# Altium PCB mcu.PcbDoc (part 3 of 3)
Units mil, origin at the board's own origin, x right, y up, seen from the top; angles counter-clockwise.
Board outline 2000 x 2000 mil, 2 copper layers (Top Layer, Bottom Layer); 145 components, 109 nets, 608 pads, 708 vias.
Unrouted connection lines stored in the file: 2.
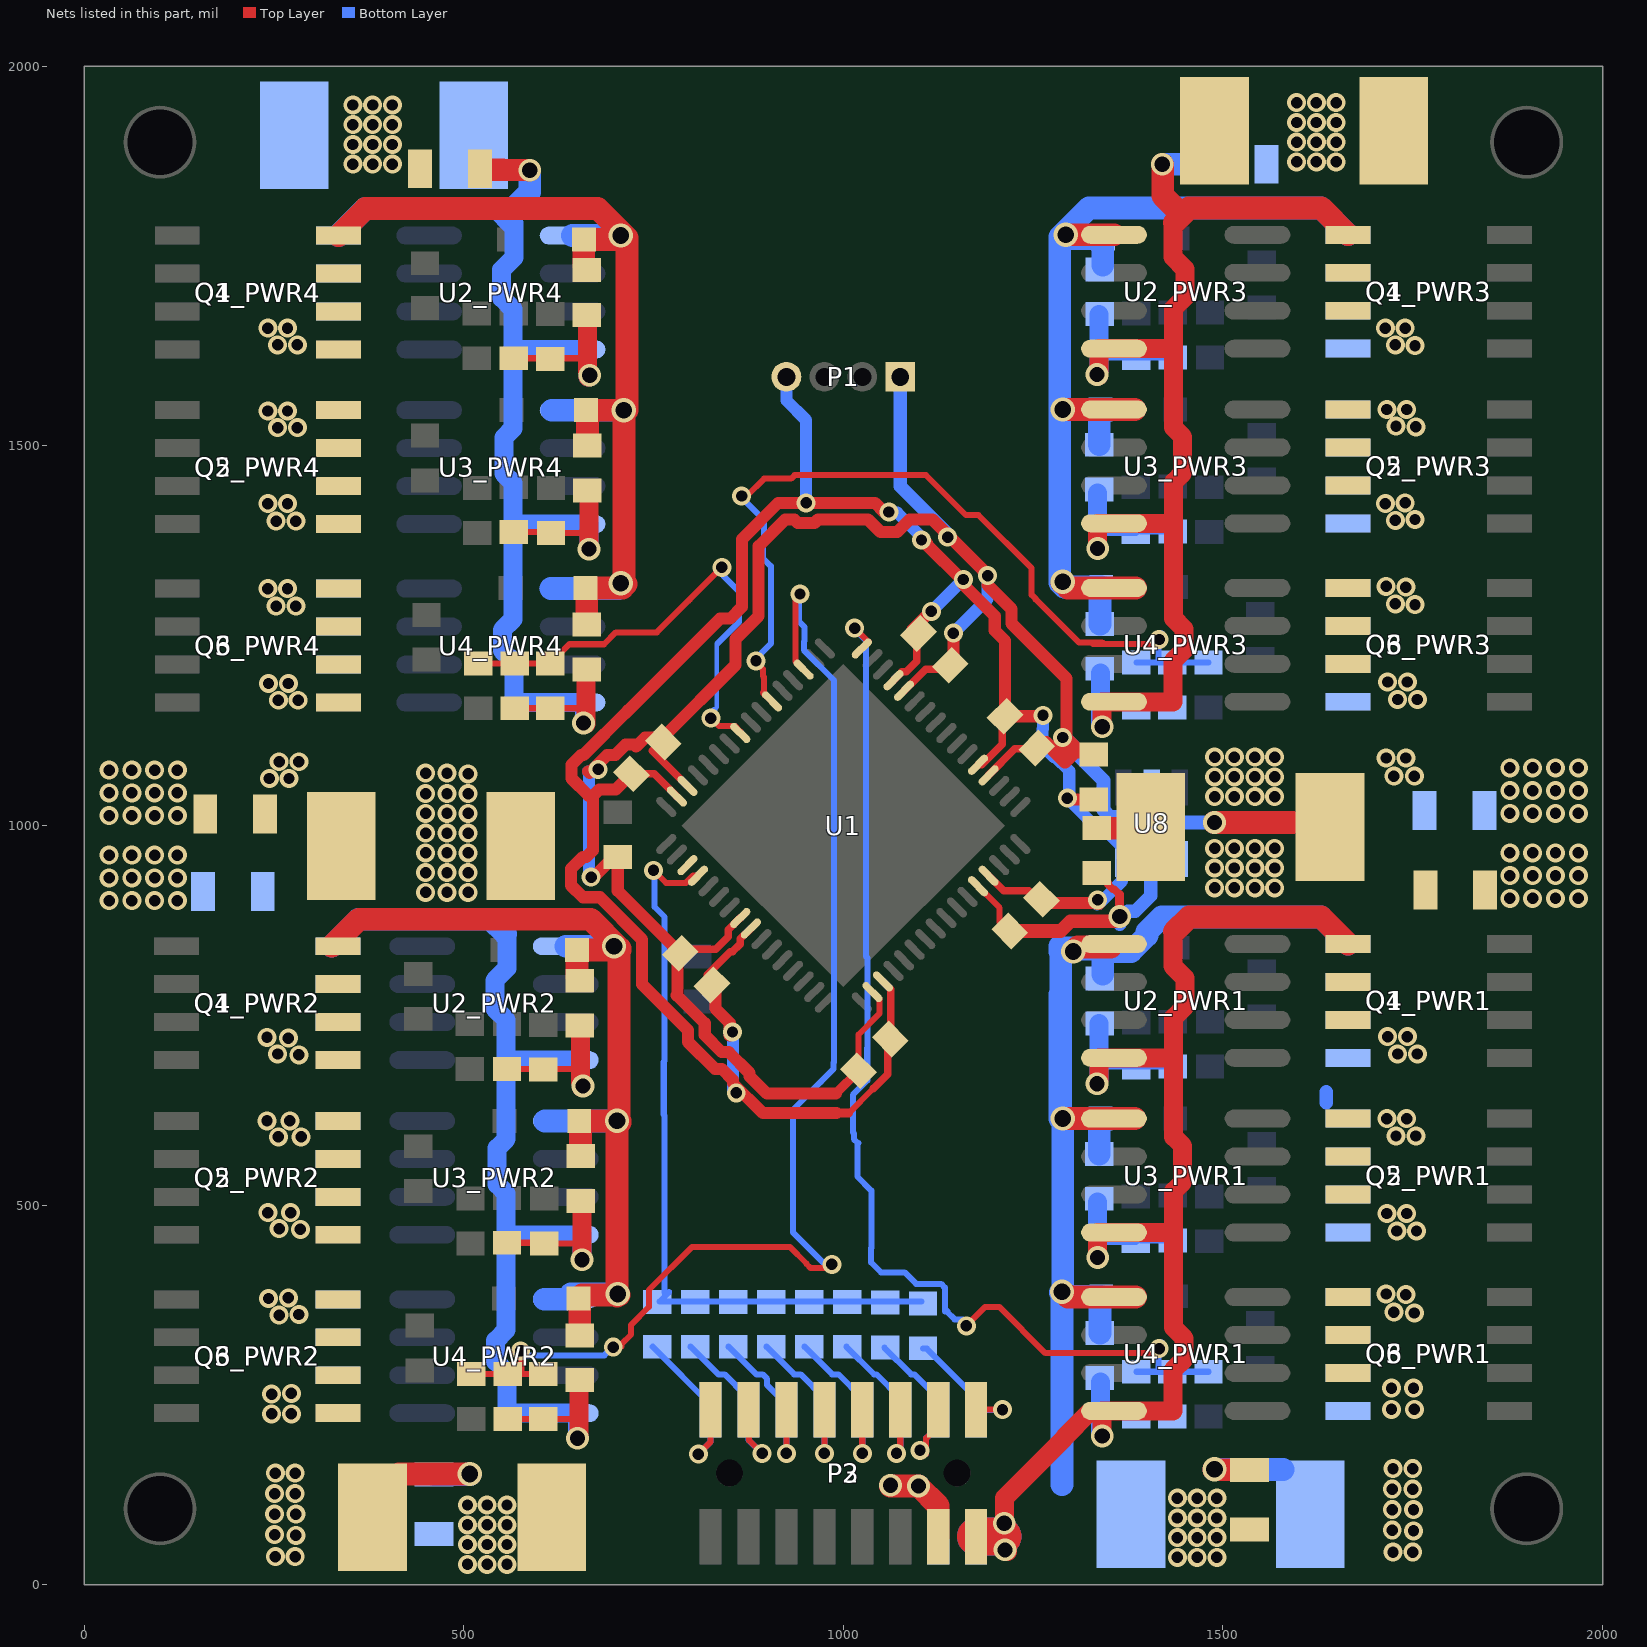
[diagram p3: the nets of this part, all layers, seen from the top]

## Via types
v1: diameter 25, hole 15, Top Layer to Bottom Layer, tented both sides, 650 vias
v2: diameter 30, hole 20, Top Layer to Bottom Layer, tented both sides, 44 vias
v3: diameter 32, hole 22, Top Layer to Bottom Layer, tented both sides, 14 vias

## Nets (pads, with @x,y where several pads share a name; then routed paths per layer and width w, separated by ;. In a path a pad name is that pad's centre, name@x,y a point inside that pad or via, vN(x,y) a via of type N, cw(c..) or ccw(c..) an arc to the next point about the centre after c; other vN are vias at no path point) (continued)
SENSEC1: C13_PWR1.1 R3_PWR1.1 R25_PWR1.1 U1.64 | length 1501.2
  Top Layer w8: v1(1015,1260) 1033,1242 1024.36,1233.36 U1.64@1024.36,1233.15 ; v1(1162,341) 1187,366 1205,366 ; 1205.4,366 1266.21,305.19 v1@1415.13,305.19
  Bottom Layer w8: v1@1014,1259 1030,1243 1030,827.52 1032,825.52 1032,707.22 1031.5,706.72 1031.5,664.28 1012.5,645.28 1012.5,595.88 1014,594.38 1014,587 1019.38,581.62 1020,581.62 1018.5,580.12 1018.5,537.7 1037,519.2 1037,443.82 1036.5,443.32 1036.5,424.68 1049.68,411.5 1080.68,411.5 1095.9,396.28 1128.72,396.28 1133.7,391.3 1133.7,360.3 1136.88,360.3 ; 1135.88,360.3 1146.68,349.5 1157.5,349.5 1162,345 v1(1162,341) ; C13_PWR1.1@1386,280.53 R3_PWR1.1@1481,280.53 ; R25_PWR1.1@1415,280.53 v1@1415,305.06 ; v1(1416,311) 1416,319 v1@1420,319
SENSEC2: C13_PWR2.1 R3_PWR2.1 R25_PWR2.1 U1.3 | length 1657.7
  Top Layer w8: R3_PWR2.1@510.01,277.53 C13_PWR2.1@605.01,277.53 ; R25_PWR2.1@576.01,277.53 v1@576.01,302.06 ; v1@708,314 708,317.18 720.42,329.6 720.42,342.26 744.01,365.85 744.01,388.21 800.8,445 929.62,445 951.5,423.12 951.5,422.52 956.7,417.32 982.68,417.32 984,416 985,417 v1(985,422) ; v1@937,1299.82 937,1216.11 U1.3@947.8,1205.31
  Bottom Layer w8: v1@575.88,302.19 685.19,302.19 v1@692,309 ; 933.68,621.68 933.68,464.32 v1@983,415 ; 934,621 934,626 970.32,662.32 ; v1@941.5,1303.3 941.5,1268.88 949,1261.38 949,1243.38 ; 948,1242.38 948,1231 988,1191 988,745.61 ; 970.32,662.5 987,679.18 987,687.6 ; 987.5,688.1 987.5,745.11
  other v1: 575.01,308 697,313 943,1305
SENSEC3: C13_PWR3.1 R3_PWR3.1 R25_PWR3.1 U1.6 | length 1126.3
  Top Layer w8: v1(866,1434) 872.62,1434 895.62,1457 931.38,1457 935.88,1461.5 1108.88,1461.5 1161.38,1409 1178,1409 1247.99,1339.01 1247.99,1303.91 1253.5,1298.4 1253.5,1297.92 1310.23,1241.19 1340.81,1241.19 1343,1239 ; v1@883.5,1216.32 894,1205.82 894,1196.82 895.5,1195.32 895.5,1176.68 894,1175.18 894,1175 905.45,1163.55 U1.6@906.04,1163.55 ; 1328.99,1239.19 v1@1415.12,1239.19
  Bottom Layer w8: v1(866,1434) 865,1433 895.5,1402.5 895.5,1376.32 894.5,1375.32 894.5,1351.68 904.5,1341.68 904.5,1239.5 884,1219 884,1218 v1(885,1217) ; C13_PWR3.1@1385.99,1214.53 R25_PWR3.1@1432.99,1214.53 R3_PWR3.1@1480.99,1214.53 ; R25_PWR3.1@1414.99,1214.53 v1@1414.99,1239.06 ; v1(1415.99,1245) 1415.99,1253 v1@1419.99,1253
SENSEC4: C13_PWR4.1 R3_PWR4.1 R25_PWR4.1 U1.9 | length 660.4
  Top Layer w8: R3_PWR4.1@519.01,1213.53 R25_PWR4.1@567.01,1213.53 C13_PWR4.1@614.01,1213.53 639.26,1238.78 684.85,1238.78 700.57,1254.5 754.5,1254.5 796,1296 ; 798,1298 796,1296 ; v1(825.66,1141.5) 836.01,1131.15 856.85,1131.15 864.29,1123.71 U1.9@864.29,1121.8 ; v1@842,1340 v1(840,1340) 796,1296
  Bottom Layer w6: v1@830,1152 833.5,1155.5 833.5,1239.5 835,1241
  Bottom Layer w8: v1(825.66,1141.5) 819.5,1141.5 v1@830,1152 ; 834.5,1239.92 862.5,1267.92 862.5,1308.32 842,1328.82 842,1340 v1(840,1340)
SS: R30.1 R31.1 R32.1 R33.1 R34.1 R35.1 R36.1 R37.1 U1.20 | length 1005.6
  Top Layer w8: v1@749,936 v1@752,939 ; v1(750,941) 754,941 v1@752,939 ; v1@751,940 v1@752,939 ; U1.20@808.61,933.88 801.87,933.88 792.52,924.53 766.47,924.53 v1@752,939
  Bottom Layer w8: v1(750,941) v1@754,941 ; v1@751,940 751.5,939.5 751.5,892.68 764.5,879.68 764.5,689.72 763.5,688.72 763.5,619.28 764.5,618.28 764.5,563.68 764.31,563.49 R30.1@764.31,385.31 ; R30.1@770.31,385.31 758,373 R35.1@1004,373 ; R35.1@1005,373 R37.1@1103,373
SS0: P2.2 P3.1 R30.2 | length 222.7
  Top Layer w8: v1(809,172) 825,188 P3.1@825,211
  Bottom Layer w8: R30.2@749,313.47 827,235.47 P2.2@827,234 ; v1(809,172) 825,188 P2.2@825,230.66
SS1: P2.4 P3.3 R31.2 | length 239.3
  Top Layer w8: P3.3@876,225 876,190 v1(893,173)
  Bottom Layer w8: R31.2@799,313.47 835.39,277.08 843.71,277.08 871,249.79 P2.4@871,233 ; P2.4@875,230.66 875,191 v1(893,173)
SS2: P2.6 P3.5 R32.2 | length 229.2
  Top Layer w8: v1(925,173) P3.5@925,230.66
  Bottom Layer w8: R32.2@849,313.47 885.39,277.08 893.71,277.08 899.57,271.22 899.57,262.91 925.47,237 P2.6@926,237 ; v1(925,173) P2.6@925,230.66 P2.6@925,231
SS3: P2.8 P3.7 R33.2 | length 226.3
  Top Layer w8: v1(975,173) 975,223 P3.7@977,225
  Bottom Layer w8: R33.2@899,313.47 935.39,277.08 943.71,277.08 975,245.79 P2.8@975,234 ; v1(975,173) P2.8@975,230.66
SS4: P2.10 P3.9 R34.2 | length 230.5
  Top Layer w8: v1(1025,173) P3.9@1025,230.66
  Bottom Layer w8: R34.2@949,313.47 985.39,277.08 993.71,277.08 1025,245.79 P2.10@1025,232 ; v1(1025,173) P2.10@1025,228
SS5: P2.12 P3.11 R35.2 | length 240.5
  Top Layer w8: v1(1070,173) 1075,173 P3.11@1075,230.66 P3.11@1075,233
  Bottom Layer w8: R35.2@1004,313.47 1040.39,277.08 1043.71,277.08 1075,245.79 P2.12@1075,232 ; v1(1070,173) 1075,173 P2.12@1075,230.66
SS6: P2.14 P3.13 R36.2 | length 257.5
  Top Layer w8: v1(1101,177) 1104,177 1109,172 1109,193 1125,209 P3.13@1125,230.66
  Bottom Layer w8: R36.2@1054,312.47 1089.39,277.08 1093.71,277.08 1125,245.79 P2.14@1125,230.66 P2.14@1125,228 ; v1(1101,177) 1104,177 1109,172 1109,193 1125,209 P2.14@1125,221
SS7: P2.16 P3.15 R37.2 | length 182.2
  Top Layer w8: P3.15@1175,230.66 v1(1209.66,230.66)
  Bottom Layer w8: R37.2@1105,311.47 R37.2@1110.32,311.47 ; R37.2@1109.32,311.47 1174,246.79 1174,231 P2.16@1175,231 ; P2.16@1176,230 1209,230 v1(1209.66,230.66)
TX: U1.19
VBAT: C2.1 C3.1 C4.1 C5.1 C6.1 C8.1 C9.1 C10.1 C11.1 C17_PWR1.1 C17_PWR2.1 C17_PWR3.1 C17_PWR4.1 C18_PWR1.1 C18_PWR2.1 C18_PWR3.1 C18_PWR4.1 C19_PWR1.1 C19_PWR2.1 C19_PWR3.1 C19_PWR4.1 C25.1 C26.1 C27.1 C28.1 C29.1 C30.1 D5_PWR1.1 D5_PWR2.1 D5_PWR3.1 D5_PWR4.1 D6_PWR1.1 D6_PWR2.1 D6_PWR3.1 D6_PWR4.1 D7_PWR1.1 D7_PWR2.1 D7_PWR3.1 D7_PWR4.1 P2.13 P3.14 Q1_PWR1.5 Q1_PWR1.6 Q1_PWR1.7 Q1_PWR1.8 Q1_PWR2.5 Q1_PWR2.6 Q1_PWR2.7 Q1_PWR2.8 Q1_PWR3.5 Q1_PWR3.6 Q1_PWR3.7 Q1_PWR3.8 Q1_PWR4.5 Q1_PWR4.6 Q1_PWR4.7 Q1_PWR4.8 Q2_PWR1.5 Q2_PWR1.6 Q2_PWR1.7 Q2_PWR1.8 Q2_PWR2.5 Q2_PWR2.6 Q2_PWR2.7 Q2_PWR2.8 Q2_PWR3.5 Q2_PWR3.6 Q2_PWR3.7 Q2_PWR3.8 Q2_PWR4.5 Q2_PWR4.6 Q2_PWR4.7 Q2_PWR4.8 Q3_PWR1.5 Q3_PWR1.6 Q3_PWR1.7 Q3_PWR1.8 Q3_PWR2.5 Q3_PWR2.6 Q3_PWR2.7 Q3_PWR2.8 Q3_PWR3.5 Q3_PWR3.6 Q3_PWR3.7 Q3_PWR3.8 Q3_PWR4.5 Q3_PWR4.6 Q3_PWR4.7 Q3_PWR4.8 U2_PWR1.1 U2_PWR2.1 U2_PWR3.1 U2_PWR4.1 U3_PWR1.1 U3_PWR2.1 U3_PWR3.1 U3_PWR4.1 U4_PWR1.1 U4_PWR2.1 U4_PWR3.1 U4_PWR4.1 U8.4 | length 6525.8
  Top Layer w30: Q1_PWR2.8@326.31,841 361.81,876.5 667.51,876.5 v3@706.01,838 ; Q1_PWR4.8@335.31,1777 370.81,1812.5 676.51,1812.5 v3@715.01,1774 ; C3.1@415,146 v3(508,146) ; C17_PWR2.1@649.22,801.21 D5_PWR2.1@649.22,836 706.01,836 704.5,834.49 v3@704.5,612.51 ; D7_PWR2.1@651.22,377 655.72,381.5 704.51,381.5 v3@705.01,382 ; D7_PWR2.1@652.01,372 653.01,371 C19_PWR2.1@653.01,328.53 ; D6_PWR2.1@652.22,611 D6_PWR2.1@654.01,611 ; C18_PWR2.1@654.01,564.53 D6_PWR2.1@654.01,611 ; C17_PWR4.1@658.22,1737.21 D5_PWR4.1@658.22,1772 715.01,1772 v3@715.01,1547 ; D7_PWR4.1@660.22,1313 709.01,1313 v3@714.01,1318 ; D7_PWR4.1@661.01,1308 662.01,1307 C19_PWR4.1@662.01,1264.53 ; D6_PWR4.1@661.22,1547 D6_PWR4.1@663.01,1547 ; C18_PWR4.1@663.01,1500.53 D6_PWR4.1@663.01,1547 ; v3@702.01,380.01 v3(702.01,611) D6_PWR2.1@654.01,611 ; v3@710,1315 711.01,1316.01 v3(711.01,1547) D6_PWR4.1@663.01,1547 ; v2@1062,130 v2(1099,130) 1125,104 P3.14@1125,63.34 ; v3(1288,386) 1289,386 1296,379 U4_PWR1.1@1356.51,379 U4_PWR1.1@1385,379 ; v3(1289,614) U3_PWR1.1@1356.51,614 U3_PWR1.1@1384,614 ; v3(1289,1321) 1287.99,1320 1288.99,1320 1295.99,1313 U4_PWR3.1@1356.5,1313 U4_PWR3.1@1384.99,1313 ; v3(1288.99,1548) U3_PWR3.1@1356.5,1548 U3_PWR3.1@1383.99,1548 ; v3(1292.99,1778) U2_PWR3.1@1356.5,1778 ; v3(1303,834) 1308.84,839.84 U2_PWR1.1@1352.35,839.84 ; C30.1@1334,996.53 1372.53,996.53 C5.1@1373,997 ; v3(1489,152) 1488.37,151.37 C11.1@1535,151.37 ; v3@704.5,612.51 706.01,611 706.01,609 704.5,609 v3@704.5,612.51
  Bottom Layer w18: 1636,635 1636,649
  Bottom Layer w30: C25.1@461,145.37 508.63,145.37 v3(508,146) ; U4_PWR2.1@606.01,376 U4_PWR2.1@634.5,376 641.5,383 v3(703.01,383) ; U3_PWR2.1@607.01,611 U3_PWR2.1@634.5,611 v3(702.01,611) ; U4_PWR4.1@615.01,1312 U4_PWR4.1@643.5,1312 704.01,1312 707,1314.99 v3(707,1319) ; U3_PWR4.1@616.01,1547 U3_PWR4.1@643.5,1547 v3(711.01,1547) ; U2_PWR2.1@634.5,841 v3(698.01,841) ; U2_PWR4.1@643.5,1777 v3(707.01,1777) ; 1285,841 1289,837 1345.62,837 1348.62,834 1378.91,834 1400,855.09 1400,859.98 1419.52,879.5 1629.2,879.5 Q1_PWR1.8@1664.7,844 ; v3@1284.99,1320 1284.99,1773 D5_PWR3.1@1341.78,1773 C17_PWR3.1@1341.78,1738.21 ; v3@1284.99,1775 1323.49,1813.5 1629.19,1813.5 Q1_PWR3.8@1664.69,1778 ; v3@1285.99,1319 1290.99,1314 D7_PWR3.1@1339.78,1314 ; 1288,132 v3(1288,386) ; v3(1288.99,1548) D6_PWR3.1@1336.99,1548 ; C18_PWR1.1@1337,567.53 D6_PWR1.1@1337,614 ; C18_PWR3.1@1336.99,1501.53 D6_PWR3.1@1336.99,1548 ; C19_PWR1.1@1338,331.53 1338,374 D7_PWR1.1@1339,375 ; C19_PWR3.1@1337.99,1265.53 1337.99,1308 D7_PWR3.1@1338.99,1309 ; D6_PWR1.1@1338.79,614 D6_PWR1.1@1337,614 ; D6_PWR3.1@1338.78,1548 D6_PWR3.1@1336.99,1548 ; D7_PWR1.1@1339.79,380 1291,380 1286,385 1289,388 v3(1289,614) D6_PWR1.1@1337,614 ; C17_PWR1.1@1341.79,804.21 D5_PWR1.1@1341.79,839 1285,839 ; v3(1489,152) C28.1@1579,152 ; 1285,839 1286.5,837.5 1286.5,832.5 ; 1285,839 1285,834 1286.5,832.5 ; 1286.5,779.12 1286.5,615.5 1285,614 1285,777.62 1286.5,779.12 ; 1286.5,779.12 1286.5,832.5
  other v1: 33,901 63,901 93,901 123,901 1878,904 1908,904 1938,904 1968,904 1489,918 1515,918 1542,918 1568,918 33,931 63,931 93,931 123,931 1878,934 1908,934 1938,934 1968,934 1489,944 1515,944 1542,944 1568,944 33,961 63,961 93,961 123,961 1878,964 1908,964 1938,964 1968,964 1489,970 1515,970 1542,970 1568,970 1489,1038 1515,1038 1542,1038 1568,1038 1489,1064 1515,1064 1542,1064 1568,1064 1489,1090 1515,1090 1542,1090 1568,1090 354,1871 380,1871 406,1871 1597,1874 1623,1874 1649,1874 354,1897 380,1897 406,1897 1597,1900 1623,1900 1649,1900 354,1923 380,1923 406,1923 1597,1926 1623,1926 1649,1926 354,1949 380,1949 406,1949 1597,1952 1623,1952 1649,1952
  other v2: 1062,131
VCC: C1.1 C20.1 C21.1 C22.1 C23.1 C24.1 C31.1 P1.4 U1.15 U1.25 U1.35 U1.45 U1.53 U1.61 U8.5 | length 3281.4
  Top Layer w8: 1007,621.21 1039.39,653.61
  Top Layer w10: C21.1@716,1079 727,1068 751.05,1068 U1.15@780.77,1038.28 ; C23.1@821,798 821,803.23 851.27,833.5 854.04,833.5 864.5,843.96 864.5,850.58 U1.25@878.21,864.29 ; 1039.39,653.61 1058.5,672.71 1058.5,715.5 C22.1@1061.88,718.88 ; U1.35@1052.2,794.69 1062.63,784.25 C22.1@1062.63,732 ; U1.61@1066.12,1191.39 1077.34,1202.61 1082.73,1202.61 1096.5,1216.38 1096.5,1236.5 1093,1240 C20.1@1107,1254 ; U1.53@1177.47,1080.04 1182.27,1080.04 1209.5,1107.27 1209.5,1132.38 C1.1@1212,1134.88 ; U1.45@1191.39,933.88 1211.27,914 1244,914
  Top Layer w12: 991.21,621.21 1007,621.21
  Top Layer w16: 712,1147 837.5,1272.5 850.98,1272.5 866.5,1288.02 866.5,1377.09 914.41,1425 v1(951,1425) 1041.64,1425 1053.64,1413 v1(1060,1413) ; 716,1151.11 657.89,1093 654.89,1093 642,1080.11 642,1061.89 664.8,1039.09 670.3,1039.09 ; C21.1@717,1070 720,1067 700.29,1047.29 678.5,1047.29 670.3,1039.09 ; C23.1@826.88,780.12 C23.1@826.88,790.12 ; C23.1@827,792 831.5,787.5 831.5,759.02 850.5,740.02 850.5,723.5 854,727 v1(854,728) ; 991.21,621.21 894,621.21 854.5,660.72 854.5,664.98 839.98,679.5 830.86,679.5 795.5,714.86 795.5,730.39 735.01,790.88 735.01,850.01 679.52,905.5 657.02,905.5 641.5,921.02 641.5,942.98 657.02,958.5 661.5,958.5 670.3,967.3 670.3,1039.09 ; C20.1@1091,1255 1091,1258 1116,1283 v1(1116,1282) ; v1(1103,1376) v1@1106,1376 ; C24.1@1260.88,897.88 1331,897.88 1331,903 1337,897 1334,897 1334,901 v1(1335,902) ; v1@1261.88,1143.88 C1.1@1213.12,1143.88 1213.12,1243.31 1199.5,1256.93 1199.5,1276.03 1158,1317.53 v1(1158,1324) 1155.9,1324 1111,1368.91 1111,1371 v1@1106,1376 ; v1(1295,1036) 1296.53,1034.47 C31.1@1330,1034.47 ; v1@1106,1376 1106.5,1376.5 1105.5,1376.5 v1@1106,1376
  Bottom Layer w16: v1(854,728) 854.5,727.5 854.5,652.5 v1(859,648) ; P1.4@925,1591 925,1560 951,1534 v1(951,1425) ; v1(1060,1413) 1071,1412 1106.5,1376.5 1106,1376 v1(1103,1376) ; v1(1116,1282) v1(1158,1324) ; 1262.5,1126.98 1262.5,1105.02 1278.02,1089.5 ; 1263,1127.48 v1(1263,1145) ; 1279.98,1089.5 1297.5,1071.98 v1@1297.5,1036 ; v1@1292,1036 v1(1295,1036) ; v1@1297.5,1033.15 1342.03,988.62 1350.38,988.62 1368,971 U8.5@1368,959 ; v1@1334,896 1334,901 v1(1335,902) ; v1@1334,897 1337,897 1367,927 U8.5@1367,954
VGND: C1.2 C2.2 C3.2 C4.2 C5.2 C6.2 C7_PWR1.2 C7_PWR2.2 C7_PWR3.2 C7_PWR4.2 C8.2 C9.2 C10.2 C11.2 C12_PWR1.2 C12_PWR2.2 C12_PWR3.2 C12_PWR4.2 C13_PWR1.2 C13_PWR2.2 C13_PWR3.2 C13_PWR4.2 C17_PWR1.2 C17_PWR2.2 C17_PWR3.2 C17_PWR4.2 C18_PWR1.2 C18_PWR2.2 C18_PWR3.2 C18_PWR4.2 C19_PWR1.2 C19_PWR2.2 C19_PWR3.2 C19_PWR4.2 C20.2 C21.2 C22.2 C23.2 C24.2 C25.2 C26.2 C27.2 C28.2 C29.2 C30.2 C31.2 P1.1 P2.15 P3.16 Q4_PWR1.1 Q4_PWR1.2 Q4_PWR1.3 Q4_PWR2.1 Q4_PWR2.2 Q4_PWR2.3 Q4_PWR3.1 Q4_PWR3.2 Q4_PWR3.3 Q4_PWR4.1 Q4_PWR4.2 Q4_PWR4.3 Q5_PWR1.1 Q5_PWR1.2 Q5_PWR1.3 Q5_PWR2.1 Q5_PWR2.2 Q5_PWR2.3 Q5_PWR3.1 Q5_PWR3.2 Q5_PWR3.3 Q5_PWR4.1 Q5_PWR4.2 Q5_PWR4.3 Q6_PWR1.1 Q6_PWR1.2 Q6_PWR1.3 Q6_PWR2.1 Q6_PWR2.2 Q6_PWR2.3 Q6_PWR3.1 Q6_PWR3.2 Q6_PWR3.3 Q6_PWR4.1 Q6_PWR4.2 Q6_PWR4.3 R18_PWR1.2 R18_PWR2.2 R18_PWR3.2 R18_PWR4.2 R19.1 R24_PWR1.2 R24_PWR2.2 R24_PWR3.2 R24_PWR4.2 R25_PWR1.2 R25_PWR2.2 R25_PWR3.2 R25_PWR4.2 U1.14 U1.24 U1.34 U1.44 U1.52 U1.60 U2_PWR1.4 U2_PWR2.4 U2_PWR3.4 U2_PWR4.4 U3_PWR1.4 U3_PWR2.4 U3_PWR3.4 U3_PWR4.4 U4_PWR1.4 U4_PWR2.4 U4_PWR3.4 U4_PWR4.4 U8.2 | length 11506.3
  Top Layer w8: R18_PWR2.2@557.01,450.47 C7_PWR2.2@599.54,450.47 ; R24_PWR2.2@557.01,679.47 649.54,679.47 ; R25_PWR2.2@558.01,218.47 C13_PWR2.2@604.48,218.47 ; R18_PWR4.2@566.01,1386.47 C7_PWR4.2@608.54,1386.47 ; R24_PWR4.2@566.01,1615.47 658.54,1615.47 ; R25_PWR4.2@567.01,1154.47 C13_PWR4.2@613.48,1154.47 ; C13_PWR2.2@605.01,218.47 648.48,218.47 ; C7_PWR2.2@606.01,449.47 655.47,449.47 656,450 ; C13_PWR4.2@614.01,1154.47 657.48,1154.47 ; C7_PWR4.2@615.01,1385.47 663.47,1385.47 ; C22.2@1020,683 1020,724.68 1047.63,752.32 1047.63,771.37 U1.34@1038.28,780.72 ; U1.44@1177.47,919.96 1206,891.44 C24.2@1206,872
  Top Layer w10: C21.2@762,1111.88 748.5,1098.38 U1.14@794.69,1052.2 ; C23.2@791,832 796,837 832.14,837 844.64,849.5 844.73,849.5 848.5,853.27 848.5,862.5 864.21,878.21 U1.24@864.29,878.21 ; U1.60@1080.04,1177.47 1080.22,1177.47 1108.75,1206 1136,1206 C20.2@1147,1217 ; U1.52@1191.39,1066.12 1191.39,1066.53 1225.86,1101 C1.2@1256,1101 ; C1.2@1266,1111 1264,1109 C1.2@1256,1101 ; 1294,1101 1275,1101 C1.2@1256,1101 ; 1299.53,1093.53 1301.53,1093.53 C31.2@1330,1093.53 ; C30.2@1336,936 1337.13,936 1348.61,924.52 1348.61,922.58 1355.06,916.13 1357,916.13 1364,909.13
  Top Layer w12: 990,647 C22.2@1020.12,677.12 ; v2(1364,880) 1364,909.13
  Top Layer w16: v1(668,932) 671,932 703,964 703,914 C23.2@785.12,831.88 ; v1(677,1074) 677,1071 664,1071 665.5,1069.5 689,1093 699.75,1093 713.23,1106.48 724.83,1106.48 727.15,1104.16 739,1116 754,1116 C21.2@760,1110 ; C21.2@762.88,1109.88 762.88,1116.2 858,1211.32 858,1245.56 888.5,1276.06 888.5,1367.98 923.52,1403 935.52,1403 940.02,1398.5 961.98,1398.5 966.48,1403 1032.52,1403 1049.02,1386.5 1070.98,1386.5 1087.48,1403 1117.48,1403 1184.5,1335.98 1184.5,1333.5 v1@1191,1327 ; C23.2@781.5,828.5 781.5,777.5 780.5,776.5 817.5,739.5 817.5,723.98 839.98,701.5 849.09,701.5 876.5,674.09 876.5,669.83 899.33,647 990,647 ; C20.2@1143,1211 1145,1213 v1(1145,1253.46) ; v1@1190,1316.64 1221.5,1285.14 1221.5,1266.04 1294,1193.54 1294,1101
  Top Layer w18: v1@1135.12,1379.88 v1(1137.5,1379.88) ; C24.2@1219.12,861.12 1286.28,861.12 1299.16,874 1362,874 v2@1364,876 ; C1.2@1260,1109 1264,1109 1267,1109 1275,1101 1292,1084 1301.53,1093.53 ; v1(1289,1116) 1292,1116 1308,1100 ; v2@1364,874 v2@1364,876 ; v2(1364,880) v2@1364,876
  Top Layer w25: v2(650.01,193) 652.01,195 C19_PWR2.2@652.01,264 ; C17_PWR2.2@654.01,736 654.01,662 655.01,661 655.01,655 v2@657.01,655 ; v2(656.01,428) C18_PWR2.2@656.01,501 ; v2@661.01,1134 C19_PWR4.2@661.01,1200 ; C17_PWR4.2@663.01,1672 663.01,1598 664.01,1597 664.01,1591 v2@666.01,1591 ; 663.47,1385.47 665.01,1387.01 ; v2(665.01,1364) 665.01,1387.01 ; C18_PWR4.2@665.01,1437 665.01,1387.01 ; v2@1216,44 1212,48 v2(1212,81) 1212,114 1291,193 1291,194 U4_PWR1.4@1324,227 ; v2@1334,658 1336,658 1336,664 1337,665 1337,694 U2_PWR1.4@1356.51,694 1435,694 ; v2@1333.99,1592 1335.99,1592 1335.99,1598 1336.99,1599 1336.99,1628 U2_PWR3.4@1356.5,1628 1434.99,1628 ; v2(1335,431) 1335,464 U3_PWR1.4@1356.51,464 1434,464 ; v2(1334.99,1365) 1334.99,1398 U3_PWR3.4@1356.5,1398 1433.99,1398 ; v2(1341,196) 1341,229 U4_PWR1.4@1356.51,229 1434,229 1434,282.33 1449,297.33 1449,324.67 1435,338.67 1435,518.33 1447,530.33 1447,578 1435,590 1435,694 ; v2(1340.99,1130) 1340.99,1163 U4_PWR3.4@1356.5,1163 1433.99,1163 1433.99,1216.33 1448.99,1231.33 1448.99,1258.67 1434.99,1272.67 1434.99,1452.33 1446.99,1464.33 1446.99,1512 1434.99,1524 1434.99,1628 ; 1434,859 1434,815 1450,799 1450,762 1435,747 1435,694 ; 1433.99,1793 1433.99,1749 1449.99,1733 1449.99,1696 1434.99,1681 1434.99,1628
  Top Layer w30: C27.2@521.35,1863.89 586,1863 v2(587,1863) ; v2(1420,1871) 1420.61,1870.39 1420.61,1829.39 1441,1809 ; 1436,860 1455.5,879.5 1629.5,879.5 1664.7,844.3 Q4_PWR1.1@1664.7,844 ; 1435.99,1794 1455.49,1813.5 1629.49,1813.5 1664.69,1778.3 Q4_PWR3.1@1664.69,1778 ; v2(1489,1004) 1592,1004
  Top Layer w50: P3.16@1175,63.34 1209.66,63.34
  Bottom Layer w8: 1341.47,682.47 R24_PWR1.2@1434,682.47 ; 1341.46,1616.47 R24_PWR3.2@1433.99,1616.47 ; 1342.52,1155.47 C13_PWR3.2@1385.99,1155.47 ; 1342.53,221.47 C13_PWR1.2@1386,221.47 ; C13_PWR3.2@1386.52,1155.47 R25_PWR3.2@1432.99,1155.47 ; C13_PWR1.2@1386.53,221.47 R25_PWR1.2@1433,221.47 ; C7_PWR1.2@1391.47,453.47 R18_PWR1.2@1434,453.47 ; C7_PWR3.2@1391.46,1387.47 R18_PWR3.2@1433.99,1387.47
  Bottom Layer w10: 1336.53,1386.47 C7_PWR3.2@1384.99,1386.47 ; 1337.53,452.47 C7_PWR1.2@1385,452.47
  Bottom Layer w16: v1(668,932) 665,929 665,1070 664,1071 677,1071 v1(677,1074) ; v1(1145,1253.46) 1190,1298.46 v1(1190,1329)
  Bottom Layer w18: P1.1@1075,1591 1075,1446.89 1137.5,1384.39 v1(1137.5,1379.88) ; v1(1289,1116) 1292,1116 1308,1100 1308,1094 1342.77,1059.23 1342.77,1020.41 1351.56,1011.62 1398.38,1011.62 1405,1005 ; v2@1364,870 v2@1364,876 ; v2(1364,880) v2@1364,876 ; 1405,1012 1405,1005 ; U8.2@1406,1050.24 1406,1004 ; v2(1489,1004) 1406,1004 ; v2@1364,876 1375,887 1384.59,887 1405,907.41 1405,1005 ; 1405,1005 1406,1004
  Bottom Layer w25: 557.01,461 U3_PWR2.4@634.5,461 656.01,461 v2(656.01,428) ; 557.01,856 557.01,812 541.01,796 541.01,759 556.01,744 556.01,691 ; 566.01,1397 U3_PWR4.4@643.5,1397 665.01,1397 v2(665.01,1364) ; 566.01,1792 566.01,1748 550.01,1732 550.01,1695 565.01,1680 565.01,1627 ; v2(650.01,193) 650.01,226 U4_PWR2.4@634.5,226 557.01,226 557.01,279.33 542.01,294.33 542.01,321.67 556.01,335.67 556.01,515.33 544.01,527.33 544.01,575 556.01,587 556.01,691 ; v2@657.01,655 655.01,655 655.01,661 654.01,662 654.01,691 U2_PWR2.4@634.5,691 556.01,691 ; v2@659.01,1134 659.01,1162 U4_PWR4.4@643.5,1162 566.01,1162 566.01,1215.33 551.01,1230.33 551.01,1257.67 565.01,1271.67 565.01,1451.33 553.01,1463.33 553.01,1511 565.01,1523 565.01,1627 ; v2@666.01,1591 664.01,1591 664.01,1597 663.01,1598 663.01,1627 U2_PWR4.4@643.5,1627 565.01,1627 ; v2@1334,658 1336,658 1336,664 1337,665 C17_PWR1.2@1337,739 ; v2@1333.99,1592 1335.99,1592 1335.99,1598 1336.99,1599 C17_PWR3.2@1336.99,1673 ; v2(1335,431) C18_PWR1.2@1335,504 ; v2(1334.99,1365) C18_PWR3.2@1334.99,1438 ; C19_PWR1.2@1339,267 1339,198 v2(1341,196) ; C19_PWR3.2@1338.99,1201 1338.99,1132 v2(1340.99,1130)
  Bottom Layer w30: Q4_PWR2.1@326.31,841 326.31,841.3 361.51,876.5 535.51,876.5 555.01,857 ; Q4_PWR4.1@335.31,1777 335.31,1777.3 370.51,1812.5 544.51,1812.5 564.01,1793 ; 555,1803 567.13,1815.13 567.91,1815.13 587,1834.22 v2(587,1863) ; v2(1420,1871) C26.2@1478.63,1871
  Bottom Layer w50: P2.15@1175,63.34 1209.66,63.34
  other v1: 505,27 531,27 557,27 1440,36 1466,36 1492,36 252,37 278,37 1724,43 1750,43 505,53 531,53 557,53 1440,62 1466,62 1492,62 279,65 251,66 1751,71 1723,72 505,79 531,79 557,79 1440,88 1466,88 1492,88 251,93 279,93 1723,99 1751,99 505,105 531,105 557,105 1440,114 1466,114 1492,114 251,120 278,120 1723,126 1750,126 252,147 278,147 1724,153 1750,153 247,225 273,225 1722,231 1752,231 247,251 273,252 1722,259 1751,259 257,355 283,356 1752,358 1725,359 243,377 269,378 1741,382 1715,383 1729,466 1755,466 285,468 257,469 1716,489 1742,489 242,490 272,490 256,590 286,590 1728,591 1754,591 241,611 271,611 1716,614 1742,614 283,698 255,699 1730,699 1756,699 269,720 241,721 1717,722 1743,722 450,912 478,912 506,912 450,938 478,938 506,938 450,964 478,964 506,964 450,990 478,990 506,990 33,1013 63,1013 93,1013 123,1013 450,1016 478,1016 506,1016 1878,1016 1908,1016 1938,1016 1968,1016 450,1042 478,1042 506,1042 33,1043 63,1043 93,1043 123,1043 1878,1046 1908,1046 1938,1046 1968,1046 244,1062 270,1062 1725,1065 1752,1065 506,1068 450,1069 478,1069 33,1073 63,1073 93,1073 123,1073 1878,1076 1908,1076 1938,1076 1968,1076 257,1084 283,1084 1715,1089 1741,1089 256,1165 282,1165 1730,1166 1756,1166 243,1187 269,1187 1717,1189 1743,1189 253,1289 279,1289 1753,1291 1727,1292 242,1312 268,1312 1741,1314 1715,1315 253,1401 279,1401 1727,1402 1753,1403 242,1424 268,1424 1714,1424 1740,1425 255,1524 281,1524 1754,1525 1728,1526 242,1546 268,1546 1716,1548 1742,1548 1753,1632 255,1633 281,1633 1727,1633 242,1655 268,1655 1714,1655 1740,1655
  other v2: 1213,46 657.01,657 1334,660 658,1135 666.01,1593 1333.99,1594
pads on no net: P2.0 P2.9 P2.11 P3.10 P3.12 U1.17 U1.58 U1.59 U1.65 U8.1 U8.3
copper on no net: | length 1311.8
  Top Layer w8: 726,1952 726,1851 1281,1851 ; 726,1953 1280.84,1953 1280.84,1852

## Polygon pours and split planes (outlines as drawn)
VBAT on Bottom Layer "Bottom Layer-No Net" (solid, pour order 1000): 1305,189.77 1305,0 1043,0 1043,146.64 1075.75,177.45 1090.16,191 1305,191
VBAT on Bottom Layer "Bottom Layer-No Net" (solid, pour order 1019): 559,1981 558,1982 321,1982 321,1841 322,1840 560,1840
VGND on Bottom Layer "Bottom Layer-No Net" (solid, pour order 1018): 1772,277 1772,22.77 1771.6,21 1702.4,21 1702.4,275.23 1702,277
VGND on Bottom Layer "Bottom Layer-No Net" (solid, pour order 1017): 1332,166 1332,22 1332.98,21 1502.02,21 1502.02,165 1503,166
VGND on Bottom Layer "Bottom Layer-No Net" (solid, pour order 1016): 569,161 308,161 308,164 303,169 302,170 228,170 228,19 231,16 569,16
VBAT on Bottom Layer "Bottom Layer-No Net" (solid, pour order 1015): 1581,1121 1468,1121 1467,1122 1431,1122 1431,911 1581,911
VGND on Bottom Layer "Bottom Layer-No Net" (solid, pour order 1014): 426,1089 426,878.89 424,877 425,877.95 567,877.95 567,1089
VGND on Bottom Layer "Bottom Layer-No Net" (solid, pour order 1013): 235,874 234,874.95 1,874.95 1,1102 235,1102
VBAT on Bottom Layer "Bottom Layer-No Net" (solid, pour order 1012): 1,977 1,887 141,887 141,977
VGND on Bottom Layer "Bottom Layer-No Net" (solid, pour order 1010): 2000,1000 2000,1090 1860,1090 1860,1000
OUTB1 on Bottom Layer "Out" (solid, pour order 1057): 1781,629 1781,448 1999,448 1999,629
VBAT on Bottom Layer "Bottom Layer-No Net" (solid, pour order 1011): 1766,1104 1766,877.95 1767,877 1999,877 1999,1104
VGND on Bottom Layer "Gnd" (solid, pour order 1033): 1701,1203 1701,1052 1771,1052 1771,1203
OUTA2 on Bottom Layer "Out" (solid, pour order 1041): 1,858 1,678 219,678 219,858
OUTB2 on Bottom Layer "Out" (solid, pour order 1045): 1,628 1,447 219,447 219,628
VGND on Bottom Layer "Gnd_Top" (solid, pour order 1023): 427,1049 229,1049 229,208 427,208
OUTC2 on Bottom Layer "Out" (solid, pour order 1049): 2,393 2,213 219,213 219,393
OUTC4 on Bottom Layer "Out" (solid, pour order 1048): 0,1327 0,1147 219,1147 219,1327
VGND on Bottom Layer "Gnd_Top" (solid, pour order 1022): 427,1841 229,1841 229,1038 427,1038
OUTB4 on Bottom Layer "Out" (solid, pour order 1044): 1,1562 1,1381 219,1381 219,1562
OUTA4 on Bottom Layer "Out" (solid, pour order 1040): 1,1792 1,1612 219,1612 219,1792
OUTA3 on Bottom Layer "Out" (solid, pour order 1053): 1781,1793 1781,1613 1999,1613 1999,1793
VBAT on Bottom Layer "Vbat" (solid, pour order 1037): 1572,1985 1771,1985 1771,1037 1572,1037
OUTB3 on Bottom Layer "Out" (solid, pour order 1056): 1781,1563 1781,1382 1999,1382 1999,1563
OUTC3 on Bottom Layer "Out" (solid, pour order 1061): 1781,1328 1781,1148 2000,1148 2000,1328
VGND on Bottom Layer "Gnd" (solid, pour order 1032): 1701,1438 1701,1277 1771,1277 1771,1438
VGND on Bottom Layer "Gnd" (solid, pour order 1027): 1701,1669 1701,1512 1771,1512 1771,1669
VGND on Bottom Layer "Gnd" (solid, pour order 1026): 1701,735 1701,578 1771,578 1771,735
VGND on Bottom Layer "Gnd" (solid, pour order 1031): 1701,504 1701,343 1771,343 1771,504
OUTC1 on Bottom Layer "Out" (solid, pour order 1060): 1781,394 1781,214 2000,214 2000,394
VBAT on Bottom Layer "Vbat" (solid, pour order 1036): 1572,1046 1771,1046 1771,22 1572,22
OUTA1 on Bottom Layer "Out" (solid, pour order 1052): 1781,859 1781,679 1999,679 1999,859
VGND on Top Layer "Bottom Layer-No Net" (solid, pour order 1000): 2,1095 2,992 144,992 144,1095
VBAT on Top Layer "Bottom Layer-No Net" (solid, pour order 1009): 1444,1986 1444,1844 1679,1844 1679,1985 1678,1986
VGND on Top Layer "Bottom Layer-No Net" (solid, pour order 1008): 1425,166 1686,166 1686,169 1691,174 1692,175 1766,175 1766,24 1763,21 1425,21
VGND on Top Layer "Bottom Layer-No Net" (solid, pour order 1007): 229,264 229,17.71 229.4,16 298.6,16 298.6,262.29 299,264
VGND on Top Layer "Bottom Layer-No Net" (solid, pour order 1006): 662,161 662,17 661.02,16 491.98,16 491.98,160 491,161
VBAT on Top Layer "Bottom Layer-No Net" (solid, pour order 1005): 1582,1101 1356,1101 1356,906 1579,906 1581,908
VGND on Top Layer "Bottom Layer-No Net" (solid, pour order 1004): 619.91,1087 435,1087 435,904 621,904
VGND on Top Layer "Gnd" (solid, pour order 1030): 300,1200 300,1049 230,1049 230,1200
VBAT on Top Layer "Bottom Layer-No Net" (solid, pour order 1003): 235,1101 235,874.95 234,874 2,874 2,1101
VBAT on Top Layer "Bottom Layer-No Net" (solid, pour order 1001): 2000,980 2000,890 1860,890 1860,980
VGND on Top Layer "Bottom Layer-No Net" (solid, pour order 1002): 1766,877 1767,877.95 2000,877.95 2000,1105 1766,1105
OUTA2 on Top Layer "Out" (solid, pour order 1051): 219,858 219,678 1,678 1,858
VBAT on Top Layer "Vbat" (solid, pour order 1035): 428,1022 229,1022 229,21 428,21
OUTB2 on Top Layer "Out" (solid, pour order 1055): 219,628 219,447 1,447 1,628
OUTC2 on Top Layer "Out" (solid, pour order 1059): 219,393 219,213 0,213 0,393
VGND on Top Layer "Gnd" (solid, pour order 1029): 299,503 299,342 229,342 229,503
VGND on Top Layer "Gnd" (solid, pour order 1025): 299,734 299,577 229,577 229,734
VGND on Top Layer "Gnd" (solid, pour order 1024): 299,1668 299,1511 229,1511 229,1668
VGND on Top Layer "Gnd" (solid, pour order 1028): 299,1437 299,1276 229,1276 229,1437
OUTC4 on Top Layer "Out" (solid, pour order 1058): 219,1327 219,1147 0,1147 0,1327
OUTB4 on Top Layer "Out" (solid, pour order 1054): 219,1562 219,1381 1,1381 1,1562
VBAT on Top Layer "Vbat" (solid, pour order 1034): 428,1982 229,1982 229,1000 428,1000
OUTA4 on Top Layer "Out" (solid, pour order 1050): 219,1792 219,1612 1,1612 1,1792
OUTA3 on Top Layer "Out" (solid, pour order 1039): 1999,1793 1999,1613 1781,1613 1781,1793
OUTB3 on Top Layer "Out" (solid, pour order 1043): 1999,1563 1999,1382 1781,1382 1781,1563
VGND on Top Layer "Gnd_Top" (solid, pour order 1021): 1573,1849 1771,1849 1771,998 1573,998
OUTC3 on Top Layer "Out" (solid, pour order 1047): 1998,1328 1998,1148 1781,1148 1781,1328
OUTC1 on Top Layer "Out" (solid, pour order 1046): 1998,394 1998,214 1781,214 1781,394
VGND on Top Layer "Gnd_Top" (solid, pour order 1020): 1573,1027 1771,1027 1771,209 1573,209
OUTB1 on Top Layer "Out" (solid, pour order 1042): 1999,629 1999,448 1781,448 1781,629
OUTA1 on Top Layer "Out" (solid, pour order 1038): 1999,859 1999,679 1781,679 1781,859

## Other copper
Top Layer:
  text "Falcon FC" at 751,1871 h60
  text "MCU.2" at 928,1786 h40

## Silkscreen, mask and mechanical layers (free items; w line width, h text height)
Top Overlay:
  circle w10: c185.79,1088 r34.21
  circle w10: c185.79,931 r34.21
  circle w10: c1809.79,993 r34.21
  circle w10: c1809.79,1092 r34.21
  text "3" at 1344,1890 h80
  text "4" at 267,1874 h80
  text "VDCG" at 890,1640 h60
  text "A" at 27,1566 h60
  text "A" at 1935,1565 h60
  text "B" at 27,1331 h60
  text "B" at 1935,1330 h60
  text "C" at 25,1100 h60
  text "C" at 1933,1099 h60
  text "-" at 1790,1062 h60
  text "-" at 165,1058 h60
  text "+" at 1790,961 h60
  text "+" at 166,901 h60
  text "A" at 27,631 h60
  text "A" at 1933,628 h60
  text "B" at 27,396 h60
  text "B" at 1933,393 h60
  text "C" at 25,165 h60
  text "C" at 1931,162 h60
  text "1" at 211,75 h80
  text "2" at 1617,58 h80
Bottom Overlay:
  text "0" at 737,198 h60
  text "7" at 1226,194 h60
Top Solder:
  rectangle: 1,699 86,844
  rectangle: 1,469 86,614
  rectangle: 1,229 86,374
  region: 1999,371 1914,371 1914,226 1999,226
  region: 1999,611 1914,611 1914,466 1999,466
  region: 1999,841 1914,841 1914,696 1999,696
  region: 1999,1311 1914,1311 1914,1166 1999,1166
  region: 1999,1541 1914,1541 1914,1396 1999,1396
  region: 1999,1771 1914,1771 1914,1626 1999,1626
  rectangle: 1870,890 2000,980
  rectangle: 1870,1000 2000,1090
  region: 130,1090 0,1090 0,1000 130,1000
  region: 130,980 0,980 0,890 130,890
  rectangle: 1,1629 86,1774
  rectangle: 1,1399 86,1544
  rectangle: 1,1159 86,1304
  lines w8: 726,1952 726,1851 1281,1851 ; 726,1953 1280.84,1953 1280.84,1852
  text "Falcon FC" at 751,1871 h60
  text "MCU.2" at 928,1786 h40
Bottom Solder:
  region: 130,1090 0,1090 0,1000 130,1000
  region: 130,980 0,980 0,890 130,890
  rectangle: 1,696 86,841
  rectangle: 1,456 86,601
  rectangle: 1,226 86,371
  rectangle: 1,1626 86,1771
  rectangle: 1,1386 86,1531
  rectangle: 1,1156 86,1301
  region: 1999,844 1914,844 1914,699 1999,699
  region: 1999,614 1914,614 1914,469 1999,469
  region: 1999,374 1914,374 1914,229 1999,229
  region: 1999,1774 1914,1774 1914,1629 1999,1629
  region: 1999,1544 1914,1544 1914,1399 1999,1399
  region: 1999,1304 1914,1304 1914,1159 1999,1159
  rectangle: 1870,1000 2000,1090
  rectangle: 1870,890 2000,980